# Altium PCB Copy of PCB.PcbDoc
Units mil, origin at the board's own origin, x right, y up, seen from the top; angles counter-clockwise.
Board outline 6000 x 4000 mil, 2 copper layers (Top Layer, Bottom Layer); 42 components, 19 nets, 150 pads, 0 vias.
Unrouted connection lines stored in the file: 80.
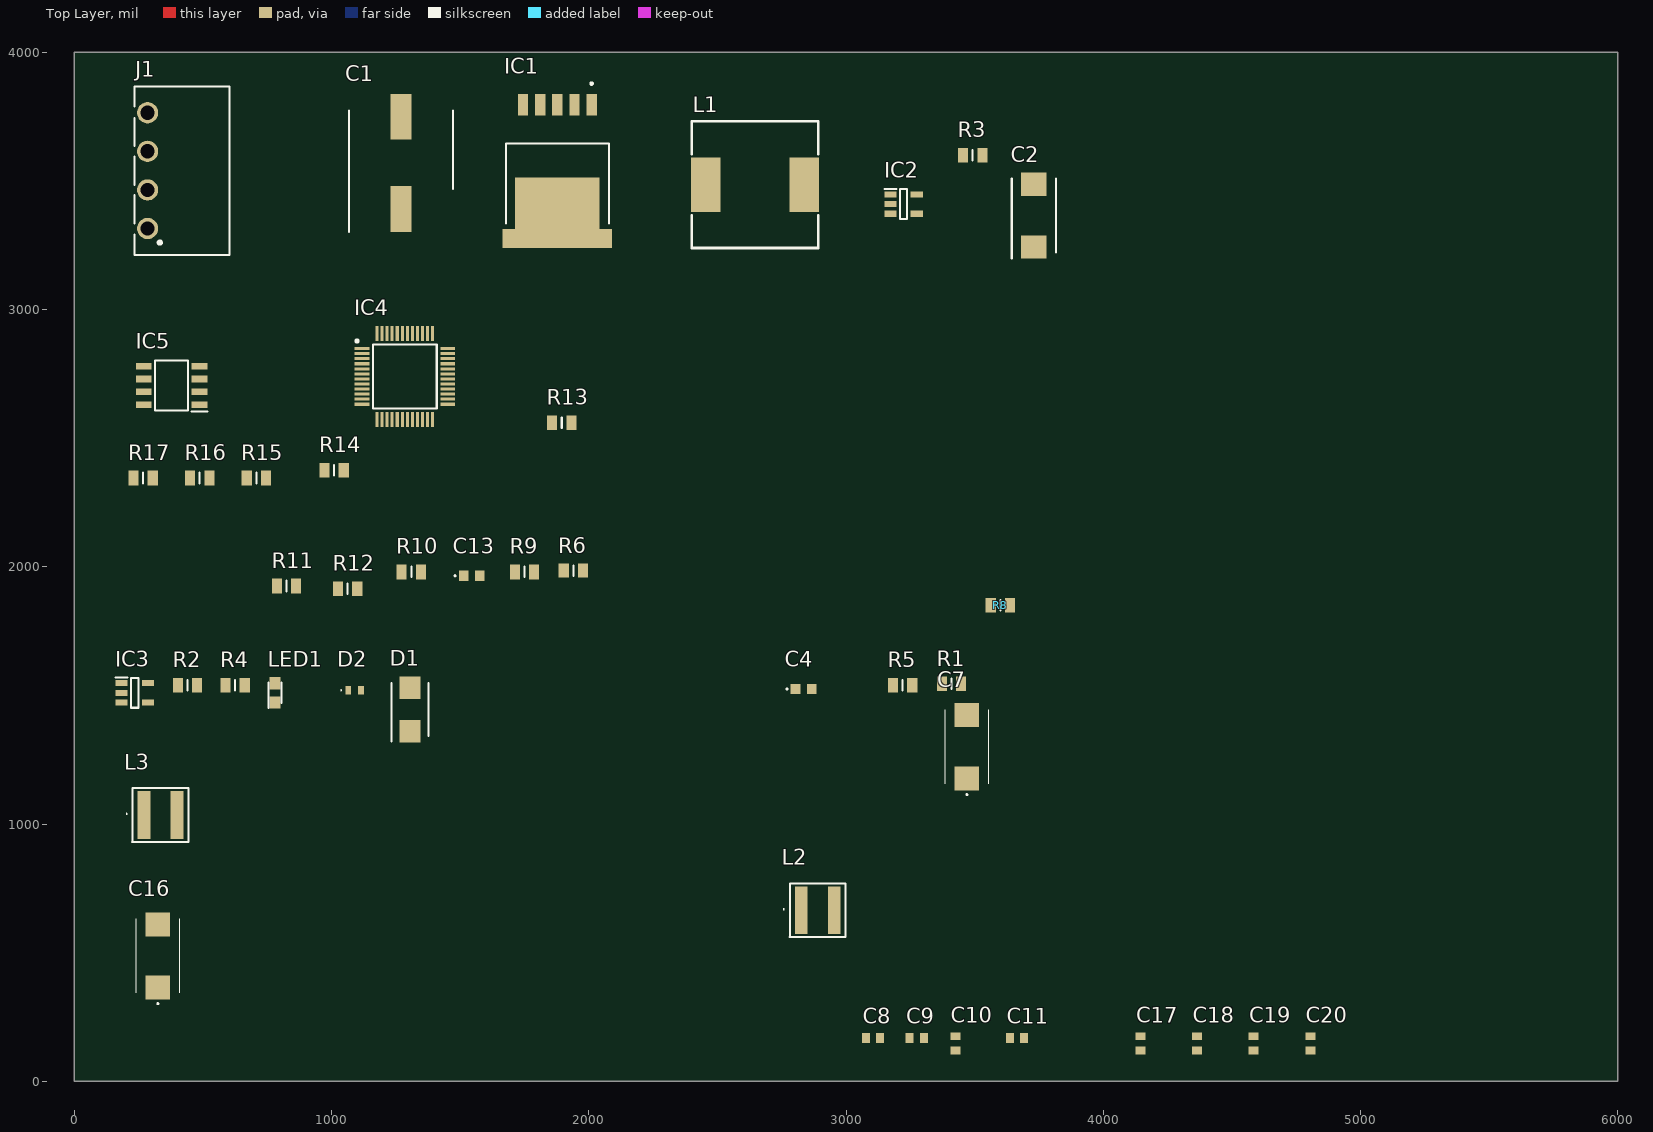
[diagram p0: Top Layer view]
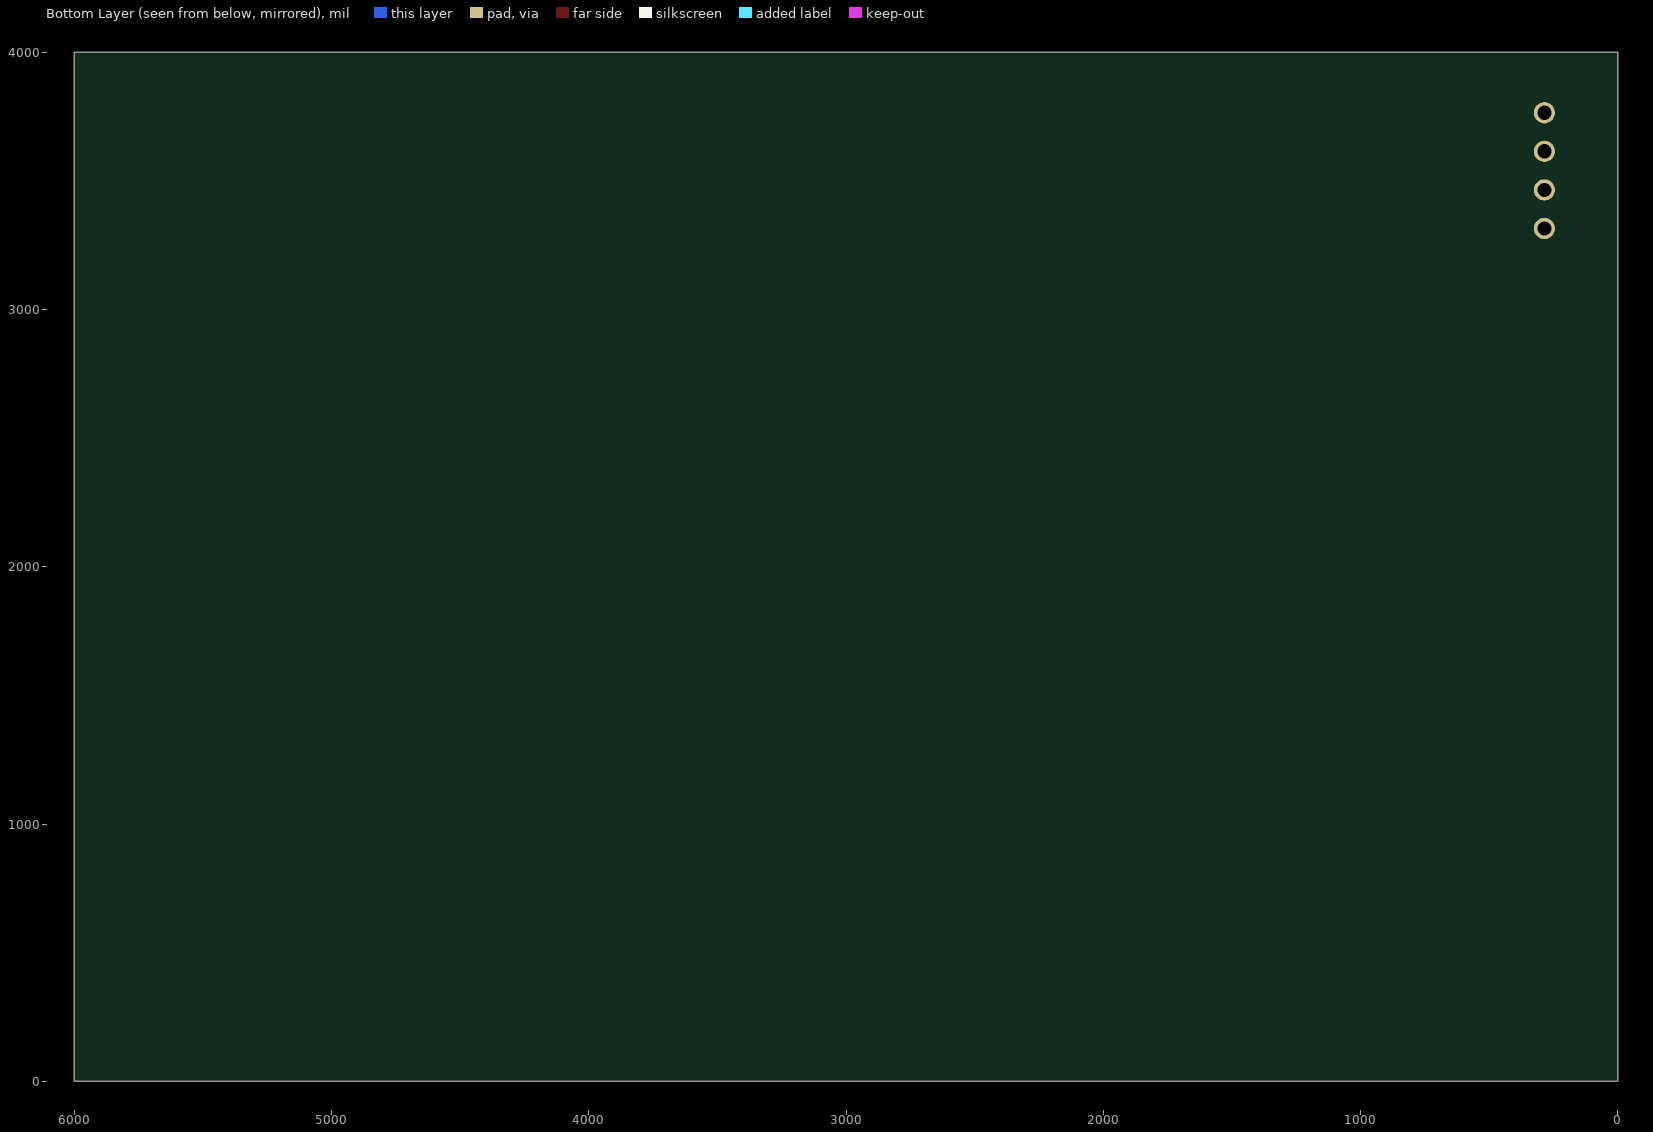
[diagram p1: Bottom Layer view, seen from below]

## Layer stack, top to bottom
Top Solder: solder mask 0.4, Solder Resist, Dk 3.5
Top Layer: signal copper 1.4
Dielectric 1: dielectric 12.6, FR-4, Dk 4.8
Bottom Layer: signal copper 1.4
Bottom Solder: solder mask 0.4, Solder Resist, Dk 3.5

## Board outline
0,0 6000,0 6000,4000 0,4000

## Design rules (kind name [scope] priority, off if disabled: settings)
Clearance [All] p1: gap=1 ignorepadtopadclearanceinfootprint=TRUE
PolygonConnect [All] p1: connectstyle=Relief reliefconductorwidth=10 reliefentries=4 polygonreliefangle="90 Angle" airgapwidth=10
RoutingVias [All] p1: holewidth=28 width=50 viastyle="Through Hole" minholewidth=28 minwidth=50 maxholewidth=28 maxwidth=50
SolderMaskExpansion [All] p1: expansion=4 istentingtop=FALSE
Width [All] p1: maxlimit=10 minlimit=10 preferedwidth=10
30 further rules are at their usual default settings.

## Classes and differential pairs
component class Sheet1: IC4 IC5 R11 R12 R13 R14 R15 R16 R17
component class Schematic: C1 C2 C4 C7 C8 C9 C10 C11 C13 C16 C17 C18 C19 C20 D1 D2 IC1 IC2 IC3 J1 L1 L2 L3 LED1 R1 R2 R3 R4 R5 R6 R8 R9 R10

## Components (designator, comment, footprint, x,y, rotation, side; value= is the part's Value field where it differs from the comment)
C1 "B40900B5477M000" CAPAE1030X1280N 1270,3570 r90 top
C2 "TAJD227K010RNJ" CAPPM7344X310N 3730,3365 r90 top
C4 "47pF" C0603 2835,1525 r0 top
C7 "470uf" T495D 3470,1300 r90 top
C8 "100nf" CAPC1608X90N 3105,167.44 r0 top
C9 "100nf" CAPC1608X90N 3275,167.44 r0 top
C10 "100nf" CAPC1608X90N 3425,147.44 r90 top
C11 "100nf" CAPC1608X90N 3665,167.44 r0 top
C13 "47pF" C0603 1545,1965 r0 top
C16 "470uf" T495D 325,487.17 r90 top
C17 "100nf" CAPC1608X90N 4145,147.44 r90 top
C18 "100nf" CAPC1608X90N 4365,147.44 r90 top
C19 "100nf" CAPC1608X90N 4585,147.44 r90 top
C20 "100nf" CAPC1608X90N 4805,147.44 r90 top
D1 "SS54B" DIOM5336X244N 1305,1445 r90 top
D2 "ESDA17P50-1U1M" ESDA17P501U1M 1090,1520 r0 top
IC1 "LM2596S-5.0" KTT0005B 1877.91,3305.55 r90 top
IC2 "SY8089A" SOT95P285X140-5N 3223.88,3409.77 r0 top
IC3 "SY8089A" SOT95P285X140-5N 235,1510 r0 top
IC4 "STM32F103C8T6XXX" QFP50P900X900X160-48N 1285,2740 r0 top
IC5 "MAX485CSA" SOIC127P600X175-8N 378.27,2705 r180 top
J1 "691322310004" 691322310004 285,3540 r90 top
L1 "SRR1260-330M" SRR1260-150M 2646.41,3485.33 r0 top
L2 "2.2uh" MPLAL50302R2 2890,665 r0 top
L3 "2.2uh" MPLAL50302R2 335,1035 r0 top
LED1 "150080GS75000" LEDM2012X80N 780,1510 r90 top
R1 "RMCF0805FT150R" RESC2012X65N 3410,1545 r0 top
R2 "100k" RESC2012X60N 440,1540 r0 top
R3 "100k" RESC2012X60N 3492.6,3600 r0 top
R4 "100k" RESC2012X60N 625,1540 r0 top
R5 "453k" RESC2012X60N 3220,1540 r0 top
R6 "560k" RESC2012X65N 1940,1985 r0 top
R8 "100k" RESC2012X60N 3600,1850 r0 top
R9 "100k" RESC2012X60N 1750,1980 r0 top
R10 "100k" RESC2012X60N 1310,1980 r0 top
R11 "120R" RESC2012X60N 825,1925 r0 top
R12 "20k" RESC2012X60N 1062.6,1915 r0 top
R13 "20k" RESC2012X60N 1895,2560 r0 top
R14 "10k" RESC2012X60N 1010,2375 r0 top
R15 "10k" RESC2012X60N 707.6,2345 r0 top
R16 "10k" RESC2012X60N 487.6,2345 r0 top
R17 "10k" RESC2012X60N 267.6,2345 r0 top

## Footprints (in the part's own frame and the unit in brackets; to place one, negate y for a bottom-side part, rotate by r counter-clockwise, add the part's x,y. Pads: shape width x height; smd on the part's side, far side on the other; paste and mask are expansions set on the pad)
691322310004 [mm]
  round 2.1 hole 1.4: 1(-5.715,0) 2(-1.905,0) 3(1.905,0) 4(5.715,0)
  silkscreen extent -8.31,-8.1 8.31,1.3
C0603 [mm]
  rect 0.95x1 smd: 1(-0.8,0) 2(0.8,0)
  silkscreen extent -1.7,-0.05 -1.6,0.05, body extent -0.87,-0.48 0.88,0.47, height 0.87
CAPAE1030X1280N [mm]
  rect 4.5x2.1 smd: 1(-4.55,0) 2(4.55,0)
  silkscreen extent -6.8,-5.15 5.15,5.15, body extent -5.67,-5.18 5.67,5.18, height 12.67
CAPC1608X90N [mm]
  rect 0.78x0.99 smd: 1(-0.7,0) 2(0.7,0)
  body extent -0.8,-0.41 0.8,0.41, height 0.9
CAPPM7344X310N [mm]
  rect 2.3x2.5 smd: 1(-3.1,0) 2(3.1,0)
  silkscreen extent -4.25,-2.17 3.65,2.17, body extent -3.65,-2.17 3.65,2.17, height 3.1
DIOM5336X244N [mm]
  rect 2.25x2.05 smd: 1(-2.15,0) 2(2.15,0)
  silkscreen extent -3.17,-1.81 2.64,1.81, body extent -2.64,-1.81 2.64,1.81, height 2.44
ESDA17P501U1M [mm]
  rect 0.55x0.8 smd: 1(-0.625,0) 2(0.625,0)
  silkscreen extent -1.4,-0.05 -1.3,0.05, body extent -0.84,-0.5 0.84,0.5, height 0.7
KTT0005B [mm]
  rect 2.16x1.02 smd: 1(12.461,-3.4) 2(12.461,-1.7) 3(12.461,0) 4(12.461,1.7) 5(12.461,3.4)
  rect 6.99x8.33 smd: 6(1.786,0)
  rect 1.91x1.235 smd: 7(-0.754,4.782) 8(-0.754,-4.782)
  silkscreen extent 0.76,-5.08 14.68,5.08, body extent -1.11,-5.08 13.24,5.08, height 4.72
LEDM2012X80N [mm]
  rect 1.2x1.05 smd: 1(-0.95,0) 2(0.95,0)
  silkscreen extent -1.48,-0.63 1,0.63, body extent -1,-0.63 1,0.63, height 0.7
MPLAL50302R2 [mm]
  rect 1.25x4.7 smd: 1(-1.625,0) 2(1.625,0)
  silkscreen extent -3.4,-2.65 2.75,2.65, body extent -2.75,-2.65 2.75,2.65, height 3.2
QFP50P900X900X160-48N [mm]
  rect 1.475x0.3 smd: 1(-4.238,2.75) 2(-4.238,2.25) 3(-4.238,1.75) 4(-4.238,1.25) 5(-4.238,0.75) 6(-4.238,0.25) 7(-4.238,-0.25) 8(-4.238,-0.75) 9(-4.238,-1.25) 10(-4.238,-1.75) 11(-4.238,-2.25) 12(-4.238,-2.75) 25(4.238,-2.75) 26(4.238,-2.25) 27(4.238,-1.75) 28(4.238,-1.25) 29(4.238,-0.75) 30(4.238,-0.25) 31(4.238,0.25) 32(4.238,0.75) 33(4.238,1.25) 34(4.238,1.75) 35(4.238,2.25) 36(4.238,2.75)
  rect 0.3x1.475 smd: 13(-2.75,-4.238) 14(-2.25,-4.238) 15(-1.75,-4.238) 16(-1.25,-4.238) 17(-0.75,-4.238) 18(-0.25,-4.238) 19(0.25,-4.238) 20(0.75,-4.238) 21(1.25,-4.238) 22(1.75,-4.238) 23(2.25,-4.238) 24(2.75,-4.238) 37(2.75,4.238) 38(2.25,4.238) 39(1.75,4.238) 40(1.25,4.238) 41(0.75,4.238) 42(0.25,4.238) 43(-0.25,4.238) 44(-0.75,4.238) 45(-1.25,4.238) 46(-1.75,4.238) 47(-2.25,4.238) 48(-2.75,4.238)
  silkscreen extent -4.85,-3.15 3.15,3.62, body extent -4.5,-4.5 4.5,4.5, height 1.6
RESC2012X60N [mm]
  rect 1x1.45 smd: 1(-0.95,0) 2(0.95,0)
  silkscreen extent 0,-0.53 0,0.53, body extent -1,-0.63 1,0.63, height 0.5
RESC2012X65N [mm]
  rect 1x1.4 smd: 1(-0.95,0) 2(0.95,0)
  silkscreen extent 0,-0.53 0,0.53, body extent -1,-0.63 1,0.62, height 0.5
SOIC127P600X175-8N [mm]
  rect 1.55x0.65 smd: 1(-2.75,1.905) 2(-2.75,0.635) 3(-2.75,-0.635) 4(-2.75,-1.905) 5(2.75,-1.905) 6(2.75,-0.635) 7(2.75,0.635) 8(2.75,1.905)
  silkscreen extent -3.52,-2.46 1.63,2.58, body extent -2.86,-2.57 2.86,2.57, height 1.66
SOT95P285X140-5N [mm]
  rect 1.2x0.6 smd: 1(-1.3,0.95) 2(-1.3,0) 3(-1.3,-0.95) 4(1.3,-0.95) 5(1.3,0.95)
  silkscreen extent -1.9,-1.48 0.35,1.5, body extent -1.43,-1.48 1.43,1.48, height 1.4
SRR1260-150M [mm]
  rect 2.9x5.4 smd: 1(-4.85,0) 2(4.85,0)
  silkscreen extent -6.25,-6.25 6.25,6.25, body extent -6.25,-6.25 6.25,6.25, height 6
T495D [mm]
  rect 2.37x2.43 smd: 1(-3.12,0) 2(3.12,0)
  silkscreen extent -4.77,-2.15 3.65,2.15, body extent -3.8,-2.3 3.8,2.3, height 3.11

## Part data
C1: "Capacitor Polarised", Manufacturer_Name=TDK, Mouser Part Number=871-B40900B5477M000, Datasheet Link=https://product.tdk.com/system/files/dam/doc/product/capacitor/aluminum-electrolytic/hybrid-polymer/data_sheet/20/30/db/aec/b40900.pdf, Height=12.8mm, Manufacturer_Part_Number=B40900B5477M000, Mouser Price/Stock=https://www.mouser.co.uk/ProductDetail/EPCOS-TDK/B40900B5477M000?qs=sPbYRqrBIVkjJ1xmSzm%2FSw%3D%3D
C2: "Capacitor Polarised 220uf 10v smd tantalum Part Number: TAJD227K010RNJ", Manufacturer_Name=AVX, Mouser Part Number=581-TAJD227K010R, Arrow Part Number=TAJD227K010RNJ, Arrow Price/Stock=https://www.arrow.com/en/products/tajd227k010rnj/avx, Datasheet Link=http://datasheets.avx.com/TAJ.pdf, Height=3.1mm, Manufacturer_Part_Number=TAJD227K010RNJ, Mouser Price/Stock=https://www.mouser.co.uk/ProductDetail/AVX/TAJD227K010RNJ?qs=min0%252Bk%2FlUAadDEgYeVIB%252Bw%3D%3D
C4 C13: library part C0603H470J5GACTU, "Capacitor Part Number: C0603H470J5GACTU 47pf 50v 0603", Manufacturer_Name=KEMET, Mouser Part Number=80-C0603H470J5GACTU, Datasheet Link=https://content.kemet.com/datasheets/KEM_C1001_C0G_200C_SMD.pdf, Height=0.87mm, Manufacturer_Part_Number=C0603H470J5GACTU, Mouser Price/Stock=https://www.mouser.co.uk/ProductDetail/KEMET/C0603H470J5GACTU?qs=OlC7AqGiEDlBSvW2T4T4RQ%3D%3D
C7 C16: library part T495D477K006ATE100, "Capacitor Polarised", Manufacturer_Name=KEMET, Mouser Part Number=80-T495D477K006E100, Arrow Part Number=T495D477K006ATE100, Arrow Price/Stock=https://www.arrow.com/en/products/t495d477k006ate100/kemet-corporation?region=nac, Datasheet Link=https://content.kemet.com/datasheets/KEM_T2009_T495.pdf, Height=3.1mm, Manufacturer_Part_Number=T495D477K006ATE100, Mouser Price/Stock=https://www.mouser.co.uk/ProductDetail/KEMET/T495D477K006ATE100?qs=JMiwNnuXh3pQ954ydQHvqQ%3D%3D
C8 C9 C10 C11 C17 C18 C19 C20: library part 06036C104MAZ2A, "Capacitor", Manufacturer_Name=AVX, Mouser Part Number=581-06036C104MAZ2A, Arrow Part Number=06036C104MAZ2A, Arrow Price/Stock=https://www.arrow.com/en/products/06036c104maz2a/avx, Datasheet Link=https://componentsearchengine.com/Datasheets/1/06031A100FAT2A.pdf, Height=0.9mm, Manufacturer_Part_Number=06036C104MAZ2A, Mouser Price/Stock=https://www.mouser.co.uk/ProductDetail/AVX/06036C104MAZ2A?qs=9g9l2Gjnh0s%2FYval7p6%252B1g%3D%3D
D1: "Diode", Manufacturer_Name="HY Electronic", Datasheet Link=https://datasheet.datasheetarchive.com/originals/distributors/Datasheets-3/DSA-43270.pdf, Height=2.44mm, Manufacturer_Part_Number=SS54B
D2: "TVS Diode (Uni-directional)", Manufacturer_Name=STMicroelectronics, Mouser Part Number=511-ESDA17P50-1U1M, Arrow Part Number=ESDA17P50-1U1M, Arrow Price/Stock=https://www.arrow.com/en/products/esda17p50-1u1m/stmicroelectronics?region=nac, Datasheet Link=http://www.st.com/content/ccc/resource/technical/document/datasheet/group3/21/d7/38/9c/80/7e/49/d0/DM00304840/files/DM00304840.pdf/jcr:content/translations/en.DM00304840.pdf, Height=0.6mm, Manufacturer_Part_Number=ESDA17P50-1U1M, Mouser Price/Stock=https://www.mouser.co.uk/ProductDetail/STMicroelectronics/ESDA17P50-1U1M?qs=aVyJF2WnouQ6X0XKPX5Sbg%3D%3D
IC1: "Integrated Circuit", Manufacturer_Name="Texas Instruments", Mouser Part Number=926-LM2596S-50, Arrow Part Number=LM2596S-5.0, Arrow Price/Stock=https://www.arrow.com/en/products/lm2596s-5.0/texas-instruments?region=nac, Datasheet Link=https://www.ti.com/lit/gpn/LM2596, Manufacturer_Part_Number=LM2596S-5.0, Mouser Price/Stock=https://www.mouser.co.uk/ProductDetail/Texas-Instruments/LM2596S-5.0?qs=X1J7HmVL2ZGcOr96VNr%252B%2Fw%3D%3D
IC2 IC3: "Integrated Circuit", Manufacturer_Name=Silergy, Datasheet Link=https://datasheet.lcsc.com/szlcsc/SY8089AAAC_C78988.pdf, Height=1.4mm, Manufacturer_Part_Number=SY8089A
IC4: "Integrated Circuit", Manufacturer_Name=ST, Height=1.6mm, Manufacturer_Part_Number=STM32F103C8T6XXX
IC5: "Integrated Circuit", Manufacturer_Name="Analog Devices", Mouser Part Number=N/A, Datasheet Link=https://datasheets.maximintegrated.com/en/ds/MAX1487-MAX491.pdf, Height=1.75mm, Manufacturer_Part_Number=MAX485CSA, Mouser Price/Stock=https://www.mouser.co.uk/ProductDetail/Maxim-Integrated/MAX485CSA?qs=LHmEVA8xxfbb%2FSUlm%252BHF3Q%3D%3D
J1: "4 Position Terminal Block Header, Male Pins, Shrouded (4 Side) 0.150 (3.81mm) 90Â°, Right Angle Through Hole", Package=None, Check_prices=https://www.snapeda.com/parts/691322310004/Wurth+Electronics+Inc./view-part/?ref=eda, MF="Wurth Electronics", MP=691322310004, SnapEDA_Link=https://www.snapeda.com/parts/691322310004/Wurth+Electronics+Inc./view-part/?ref=snap
L1: "Inductor 33uH", Manufacturer_Name=Bourns, Mouser Part Number=652-SRR1260-330M, Arrow Part Number=SRR1260-330M, Arrow Price/Stock=https://www.arrow.com/en/products/srr1260-330m/bourns?region=nac, Datasheet Link=https://www.bourns.com/docs/Product-Datasheets/SRR1260.pdf, Manufacturer_Part_Number=SRR1260-330M, Mouser Price/Stock=https://www.mouser.co.uk/ProductDetail/Bourns/SRR1260-330M?qs=R2jSSvul3fC3V4%252BTrq0P0w%3D%3D
L2 L3: library part MPL-AL5030-2R2, "Inductor Part Number :MPL-AL5030-2R2", Manufacturer_Name="Monolithic Power Systems (MPS)", Mouser Part Number=946-MPL-AL5030-2R2, Datasheet Link=https://www.monolithicpower.com/en/documentview/productdocument/index/version/2/document_type/Datasheet/lang/en/sku/MPL-AL5030-2R2/document_id/5804, Height=3.1mm, Manufacturer_Part_Number=MPL-AL5030-2R2, Mouser Price/Stock=https://www.mouser.co.uk/ProductDetail/Monolithic-Power-Systems-MPS/MPL-AL5030-2R2?qs=sPbYRqrBIVnhOZ%2F5ltO9Lw%3D%3D
LED1: "LED", Manufacturer_Name="Wurth Elektronik", Mouser Part Number=710-150080GS75000, Datasheet Link=https://katalog.we-online.com/led/datasheet/150080GS75000.pdf, Height=0.8mm, Manufacturer_Part_Number=150080GS75000, Mouser Price/Stock=https://www.mouser.co.uk/ProductDetail/Wurth-Elektronik/150080GS75000?qs=2kOmHSv6VfQRoTEZVk1mGA%3D%3D
R1: "Resistor 0805 150R 1/4W", Manufacturer_Name="Stackpole Electronics", Mouser Part Number=708-RMCF0805FT150R, Arrow Part Number=RMCF0805FT150R, Arrow Price/Stock=https://www.arrow.com/en/products/rmcf0805ft150r/stackpole-electronics?region=nac, Datasheet Link=https://cs.seielect.com/catalog/SEI-RMCF_RMCP.pdf, Height=0.65mm, Manufacturer_Part_Number=RMCF0805FT150R, Mouser Price/Stock=https://www.mouser.co.uk/ProductDetail/SEI-Stackpole/RMCF0805FT150R?qs=FESYatJ8odKRN1MTHzs13Q%3D%3D
R2 R3 R4 R8 R9 R10: library part CR0805-FX-1003ELF, "Resistor", Manufacturer_Name=Bourns, Mouser Part Number=652-CR0805FX-1003ELF, Arrow Part Number=CR0805-FX-1003ELF, Arrow Price/Stock=https://www.arrow.com/en/products/cr0805-fx-1003elf/bourns?region=nac, Datasheet Link=https://www.bourns.com/pdfs/chpreztr.pdf, Height=0.6mm, Manufacturer_Part_Number=CR0805-FX-1003ELF, Mouser Price/Stock=https://www.mouser.co.uk/ProductDetail/Bourns/CR0805-FX-1003ELF?qs=tknLyCMIRbPd3RvyRhvkuQ%3D%3D
R5: library part RK73H2ATTD4533F, "Resistor 453k 0805 1/4w", Manufacturer_Name="KOA Speer", Mouser Part Number=660-RK73H2ATTD4533F, Arrow Part Number=RK73H2ATTD4533F, Arrow Price/Stock=https://www.arrow.com/en/products/rk73h2attd4533f/koa-speer-electronics, Datasheet Link=http://www.koaspeer.com/catimages/Products/RK73H/RK73H.pdf, Height=0.6mm, Manufacturer_Part_Number=RK73H2ATTD4533F, Mouser Price/Stock=https://www.mouser.com/Search/Refine.aspx?Keyword=660-RK73H2ATTD4533F
R6: library part CPF0805B560KE, "Resistor", Manufacturer_Name="TE Connectivity", Datasheet Link=http://docs-europe.electrocomponents.com/webdocs/13d1/0900766b813d116f.pdf, Height=0.65mm, Manufacturer_Part_Number=CPF0805B560KE
R11: library part CR0805-JW-121ELF, "Resistor", Manufacturer_Name=Bourns, Mouser Part Number=652-CR0805JW-121ELF, Arrow Part Number=CR0805-JW-121ELF, Arrow Price/Stock=https://www.arrow.com/en/products/cr0805-jw-121elf/bourns?region=nac, Datasheet Link=https://www.bourns.com/pdfs/chpreztr.pdf, Height=0.6mm, Manufacturer_Part_Number=CR0805-JW-121ELF, Mouser Price/Stock=https://www.mouser.co.uk/ProductDetail/Bourns/CR0805-JW-121ELF?qs=wL7NMIHXUPnmcuStpLOKew%3D%3D
R12 R13: library part CR0805-FX-2002ELF, "Resistor", Manufacturer_Name=Bourns, Mouser Part Number=652-CR0805FX-2002ELF, Arrow Part Number=CR0805-FX-2002ELF, Arrow Price/Stock=https://www.arrow.com/en/products/cr0805-fx-2002elf/bourns?region=nac, Datasheet Link=https://www.bourns.com/pdfs/chpreztr.pdf, Height=0.6mm, Manufacturer_Part_Number=CR0805-FX-2002ELF, Mouser Price/Stock=https://www.mouser.co.uk/ProductDetail/Bourns/CR0805-FX-2002ELF?qs=mEbcl8R%252Bl%252Bv8rqM1zQjjRA%3D%3D
R14 R15 R16 R17: library part CR0805-FX-1002ELF, "Resistor", Manufacturer_Name=Bourns, Mouser Part Number=652-CR0805FX-1002ELF, Arrow Part Number=CR0805-FX-1002ELF, Arrow Price/Stock=https://www.arrow.com/en/products/cr0805-fx-1002elf/bourns?region=nac, Datasheet Link=https://www.bourns.com/pdfs/chpreztr.pdf, Height=0.6mm, Manufacturer_Part_Number=CR0805-FX-1002ELF, Mouser Price/Stock=https://www.mouser.co.uk/ProductDetail/Bourns/CR0805-FX-1002ELF?qs=tknLyCMIRbPr%252BDD0s0nG9g%3D%3D

## Nets (pads, with @x,y where several pads share a name; then routed paths per layer and width w, separated by ;. In a path a pad name is that pad's centre, name@x,y a point inside that pad or via, vN(x,y) a via of type N, cw(c..) or ccw(c..) an arc to the next point about the centre after c; other vN are vias at no path point)
3V3: C4.2 C7.1 C8.2 C9.2 C10.2 C11.2 L2.2 R5.2
4V4: C13.2 C16.1 C17.2 C18.2 C19.2 C20.2 L3.2 R6.2
+5: C2.1 IC1.4 IC2.4 IC3.4 IC5.8 L1.2 R1.2 R3.2 R9.2 R13.2
A: IC5.6 J1.2 R11.2 R13.1
B: IC5.7 J1.1 R11.1 R12.2
GND: C1.2 C2.2 C7.2 C8.1 C10.1 C11.1 C16.2 C17.1 C18.1 C19.1 C20.1 D1.2 D2.1 D2.2 IC1.3 IC1.5 IC1.6 IC2.2 IC3.2 IC5.5 J1.3 LED1.1 R2.1 R4.1 R8.1 R10.1 R12.1
M_RX: IC5.1 R14.1
M_TX: IC5.4 R17.1
NetC1_1: C1.1 IC1.1 J1.4
NetC4_1: C4.1 IC2.5 R4.2 R5.1
NetC13_1: C13.1 IC3.5 R6.1 R8.2
NetD1_1: D1.1 IC1.2 L1.1
NetIC2_1: IC2.1 R2.2 R3.1
NetIC2_3: IC2.3 L2.1
NetIC3_1: IC3.1 R9.1 R10.2
NetIC3_3: IC3.3 L3.1
NetLED1_2: LED1.2 R1.1
NetR14_2: R14.2 R15.2 R16.2 R17.2
TX_EN: IC5.2 IC5.3 R15.1 R16.1
pads on no net: C9.1 IC1.7 IC1.8 IC4.1 IC4.2 IC4.3 IC4.4 IC4.5 IC4.6 IC4.7 IC4.8 IC4.9 IC4.10 IC4.11 IC4.12 IC4.13 IC4.14 IC4.15 IC4.16 IC4.17 IC4.18 IC4.19 IC4.20 IC4.21 IC4.22 IC4.23 IC4.24 IC4.25 IC4.26 IC4.27 IC4.28 IC4.29 IC4.30 IC4.31 IC4.32 IC4.33 IC4.34 IC4.35 IC4.36 IC4.37 IC4.38 IC4.39 IC4.40 IC4.41 IC4.42 IC4.43 IC4.44 IC4.45 IC4.46 IC4.47 IC4.48